# Altium PCB MP1484_with_5V_Output.PcbDoc
Units mm, origin at the board's own origin, x right, y up, seen from the top; angles counter-clockwise.
Board outline 23.7 x 14.4 mm, 2 copper layers (Top Layer, Bottom Layer); 17 components, 11 nets, 48 pads, 10 vias.
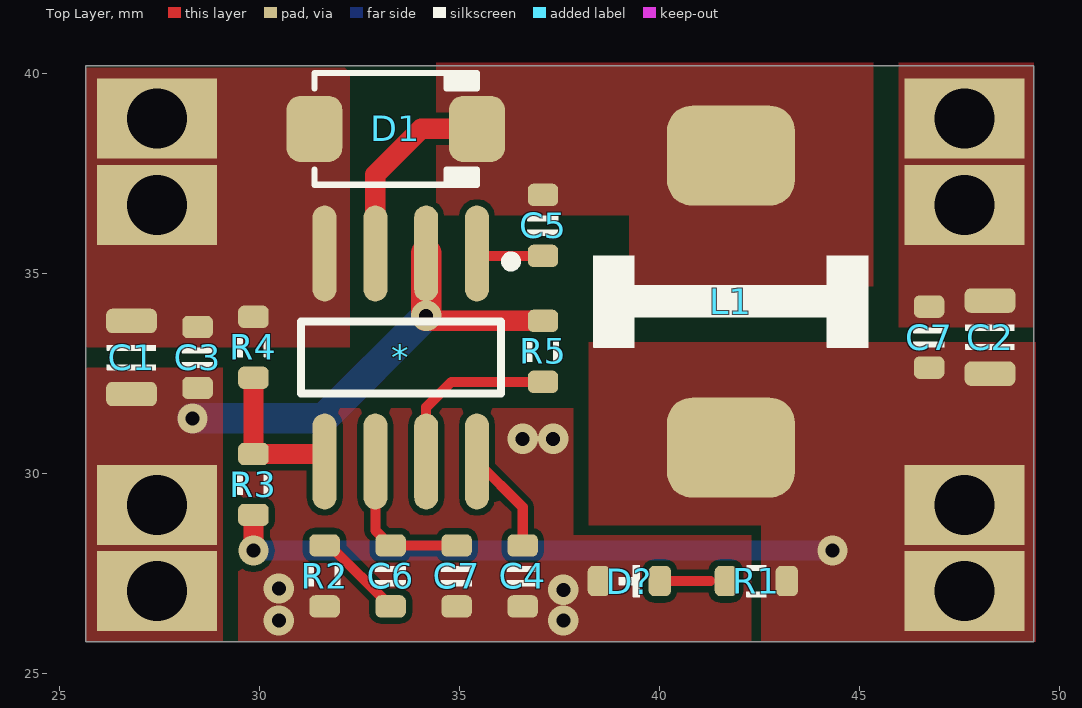
[diagram p0: Top Layer view]
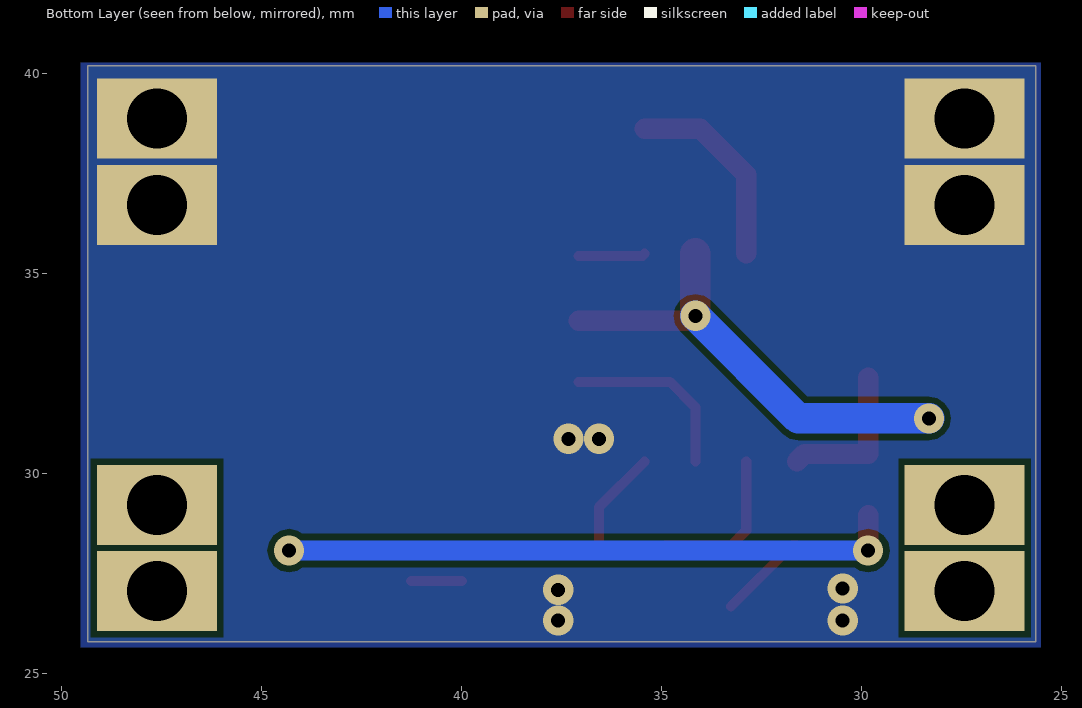
[diagram p1: Bottom Layer view, seen from below]
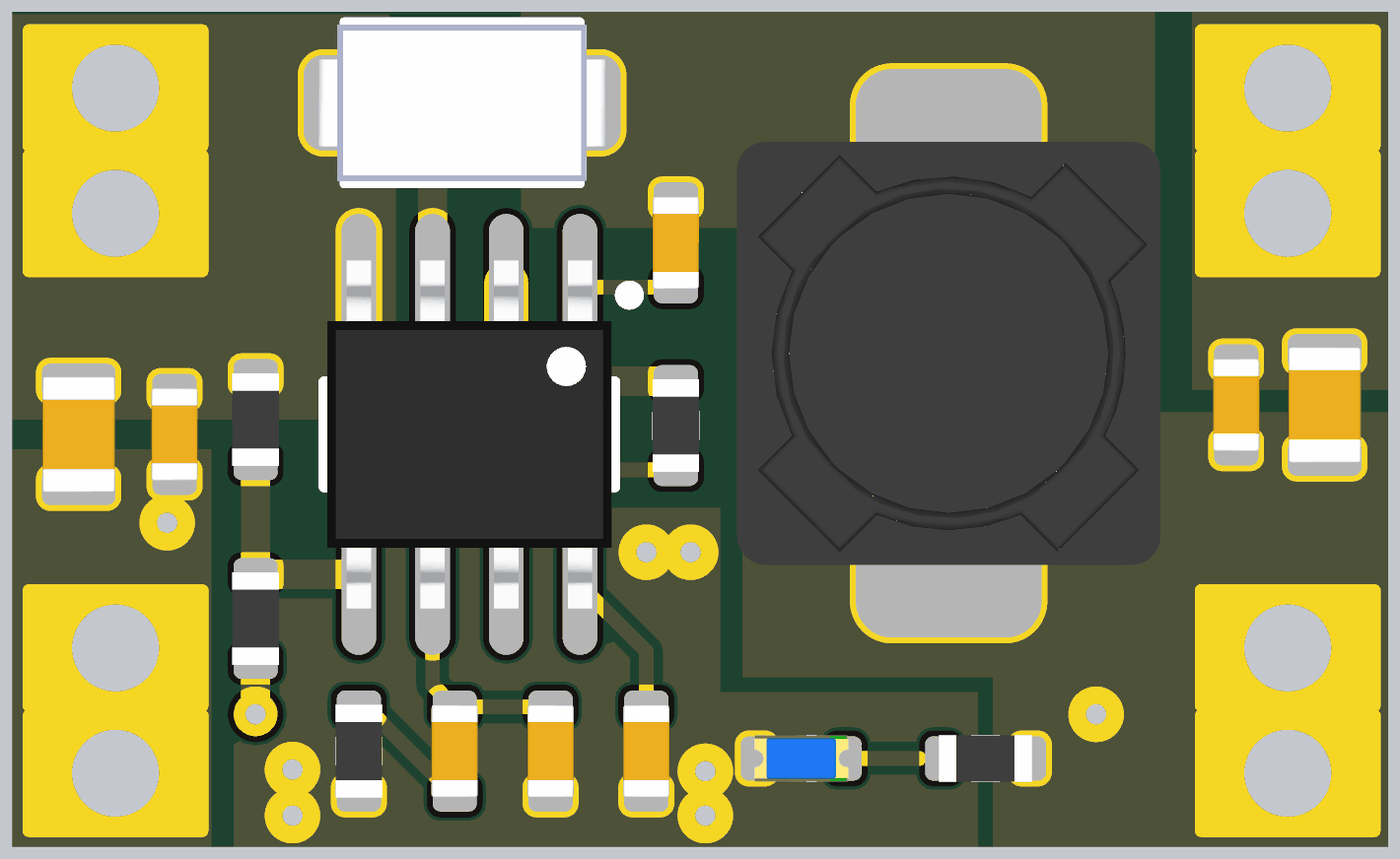
[diagram p2: 3D render of the assembled board from above, using the file's embedded part models]

## Layer stack, top to bottom
Top Solder: solder mask 0.0102, Solder Resist, Dk 3.5
Top Layer: signal copper 0.0356
Dielectric 1: dielectric 0.32, FR-4, Dk 4.8
Bottom Layer: signal copper 0.0356
Bottom Solder: solder mask 0.0102, Solder Resist, Dk 3.5

## Board outline
25.654,25.781 49.354,25.781 49.354,40.181 25.654,40.181

## Design rules (kind name [scope] priority, off if disabled: settings)
Clearance [All] p1: gap=0.152 ignorepadtopadclearanceinfootprint=TRUE
PolygonConnect PolygonConnect_1 [All] p1: connectstyle=Direct reliefconductorwidth=0.254 reliefentries=4 polygonreliefangle="90 Angle" airgapwidth=0.254
PolygonConnect [All] p2: connectstyle=Relief reliefconductorwidth=0.254 reliefentries=4 polygonreliefangle="90 Angle" airgapwidth=0.254
RoutingVias [All] p1: holewidth=0.35 width=0.756 viastyle="Through Hole" minholewidth=0.35 minwidth=0.756 maxholewidth=2.54 maxwidth=2.54
SolderMaskExpansion [All] p1: expansion=0.102
Width [All] p1: maxlimit=254 minlimit=0.152 preferedwidth=0.254 minimp=50.000000 maximp=50.000000 favimp=50.000000
30 further rules are at their usual default settings.

## Classes and differential pairs
component class MP1484_with_5V_Output: * C1 C2 C3 C4 C5 C6 C7 D1 D? L1 R1 R2 R3 R4 R5

## Components (designator, comment, footprint, x,y, rotation, side; value= is the part's Value field where it differs from the comment)
* "MP1484" SOIC8N 33.528,32.893 r270 top
C1 "Cap" CAP_0805 26.797,32.893 r270 top value=1uF
C2 "Cap" CAP_0805 48.26,33.401 r270 top value=22uF
C3 "Cap" CAP_0603 28.448,32.893 r270 top value=220nF
C4 "Cap" CAP_0603 36.576,27.432 r90 top value=0.1uF
C5 "Cap" CAP_0603 37.084,36.195 r270 top value=10nF
C6 "Cap" CAP_0603 33.274,27.432 r270 top value=6.8nF
C7 "Cap" CAP_0603 46.736,33.401 r90 top value=220nF
C7 "Cap" CAP_0603 34.925,27.432 r270 top value=220nF
D1 "SS24" DO-214AC 33.401,38.608 r0 top
D? "G" LED_0603 39.243,27.305 r180 top
L1 "Ind" IND_CDRH74 41.783,34.29 r270 top value=?H
R1 "Res" RES_0603 42.418,27.305 r180 top value=1K
R2 "Res" RES_0603 31.623,27.432 r270 top value=6.8K
R3 "Res" RES_0603 29.845,29.718 r90 top value=68K
R4 "Res" RES_0603 29.845,33.147 r90 top value=14.7K
R5 "Res" RES_0603 37.084,33.045 r270 top value=100K

## Footprints (in the part's own frame and the unit in brackets; to place one, negate y for a bottom-side part, rotate by r counter-clockwise, add the part's x,y. Pads: shape width x height; smd on the part's side, far side on the other; paste and mask are expansions set on the pad)
CAP_0603 [mil]
  rrect50% 22x30 smd: 1(-30,0) 2(30,0)
  silkscreen extent -10,-15 10,15, body extent -31,-16 31,16, height 31
CAP_0805 [mil]
  rrect50% 24x50 smd: 1(-36,0) 2(36,0)
  silkscreen extent -12,-24 12,24, body extent -39,-25 39,25, height 39
DO-214AC [mil] "SMA"
  rrect50% 55x65 smd: 1(-80,0) 2(80,0)
  silkscreen extent -80,-55 80,55, body extent -98,-53 98,53, height 85
IND_CDRH74 [mm]
  rrect50% 2.5x3.2 smd: 1(-3.65,0) 2(3.65,0)
  silkscreen extent -1.14,-3.43 1.14,3.43, body extent -3.65,-3.65 3.65,3.65, height 4.5
LED_0603 [mil]
  rrect50% 22x30 smd: 1(-30,0) 2(30,0)
  silkscreen extent -10,-16 10,16, body extent -32,-16 32,16, height 24
RES_0603 [mil]
  rrect50% 22x30 smd: 1(-30,0) 2(30,0)
  silkscreen extent -10,-16 10,16, body extent -31,-16 31,16, height 18
SOIC8N [mm] "SOIC, 8-Leads, Body 4.9x3.9mm, Pitch 1.27mm, IPC Medium Density"
  oval 2.4x0.6 smd: 1(-2.6,1.905) 2(-2.6,0.635) 3(-2.6,-0.635) 4(-2.6,-1.905) 5(2.6,-1.905) 6(2.6,-0.635) 7(2.6,0.635) 8(2.6,1.905)
  silkscreen extent -2.52,-2.5 0.9,2.88, body extent -3,-2.45 3,2.45, height 1.75

## Part data
*: "? 3A Continuous Output Current / ? Wide 4.75V to 18V Operating Input Range / ? Integrated 85m? Power MOSFET Switches / ? Output Adjustable from 0.925V to 20V / ? Up to 95% Efficiency / ? Programmable Soft-Start / ? Stable with Low ESR Ceramic Output Capacitors / ? Fixed 340KHz Frequency / ? Cycle-by-Cycle Over Current Protection / ? Input Under Voltage Lockout / ? Thermally Enhanced 8-Pin SOIC Package"
D1: library part SchottkyDiode, "Schottky Diode"
D?: library part LED, "LED"
L1: "Inductor", Specification="±5% 100mA"

## Free pads (board coordinates)
  rrect0% 3x2 hole 1.5: 1(47.625,27.051)
  rect 3x2 hole 1.5: 2(47.625,29.21) 3(47.625,38.862) 4(47.625,36.703) 5(27.432,38.862) 6(27.432,36.703) 7(27.432,29.21) 8(27.432,27.051)

## Via types
v1: diameter 0.756, hole 0.35, Top Layer to Bottom Layer, 10 vias

## Nets (pads, with @x,y where several pads share a name; then routed paths per layer and width w, separated by ;. In a path a pad name is that pad's centre, name@x,y a point inside that pad or via, vN(x,y) a via of type N, cw(c..) or ccw(c..) an arc to the next point about the centre after c; other vN are vias at no path point)
5V: C2.2 C7.1@46.736,32.639 L1.2 pad.1 pad.2 R1.1 R3.1 | length 15.4
  Top Layer w0.508: v1(29.845,28.067) R3.1
  Bottom Layer w0.508: v1(29.845,28.067) v1(44.323,28.067)
GND: *.4 C1.1 C2.1 C3.1 C4.1 C7.2 D1.1 D?.2 pad.3 pad.4 pad.5 pad.6 R2.2 R4.2
  other v1: 30.48,26.32 37.592,26.32 37.592,27.085 30.48,27.114 36.576,30.861 37.338,30.861
Net*_1: *.1 C5.2 | length 1.7
  Top Layer w0.254: *.1 35.493,35.433 C5.2
Net*_3: *.3 C5.1 D1.2 L1.1 | length 5
  Top Layer w0.508: *.3 32.893,37.465 34.036,38.608 D1.2
Net*_5: *.5 R3.2 R4.1 | length 3.8
  Top Layer w0.508: R4.1 R3.2 31.436,30.48 *.5
Net*_6: *.6 C6.1 C7.1@34.925,28.194 | length 3.9
  Top Layer w0.254: *.6 32.893,28.575 C6.1 C7.1@34.925,28.194
Net*_7: *.7 R5.2 | length 4.5
  Top Layer w0.254: *.7 34.163,31.648 34.798,32.283 R5.2
Net*_8: *.8 C4.2 | length 2.6
  Top Layer w0.254: *.8 36.576,29.15 C4.2
NetC6_2: C6.2 R2.1 | length 2.3
  Top Layer w0.254: R2.1 31.75,28.194 C6.2
NetD?_1: D?.1 R1.2 | length 1.3
  Top Layer w0.254: D?.1 41.275,27.305
Vin: *.2 C1.2 C3.2 pad.7 pad.8 R5.1 | length 11.4
  Top Layer w0.508: v1(34.163,33.934) 34.29,33.807 R5.1
  Top Layer w0.762: v1(34.163,33.934) *.2
  Bottom Layer w0.762: v1(28.321,31.369) 31.598,31.369 v1(34.163,33.934)

## Polygon pours and split planes (outlines as drawn)
GND on Top Layer "GND" (solid, pour order 26): 42.291,25.781 42.291,28.448 37.846,28.448 37.846,31.623 29.489,31.623 29.464,31.648 29.464,25.781
Net*_3 on Top Layer "GND" (solid, pour order 24): 45.339,40.259 45.339,34.671 39.243,34.671 39.243,36.449 34.417,36.449 34.417,40.259
GND on Top Layer "GND" (solid, pour order 22): 52.832,36.957
GND on Top Layer "Top Layer-GND 1" (solid, pour order 20): 49.354,40.259 49.354,33.655 45.974,33.655 45.974,40.259
5V on Top Layer "Top Layer-5V" (solid, pour order 12): 49.403,25.781 42.545,25.781 42.545,28.702 38.227,28.702 38.227,33.274 49.403,33.274
GND on Top Layer "Top Layer-GND" (solid, pour order 4): 25.654,40.132 32.131,40.132 32.258,40.005 32.258,33.147 25.654,33.147
Vin on Top Layer "Top Layer-Vin" (solid, pour order 2): 25.654,40.132
Vin on Top Layer "Top Layer-Vin 1" (solid, remove dead copper, pour order 0): 25.654,25.781 29.083,25.781 29.083,32.639 25.654,32.639
GND on Bottom Layer "Bottom Layer-GND 1" (solid, pour order 16): 25.527,40.259 25.527,25.654 49.53,25.654 49.53,40.259
GND on Bottom Layer "Bottom Layer-GND" (solid, pour order 18): 54.991,32.512

## Silkscreen, mask and mechanical layers (free items; w line width, h text height)
Mechanical 1:
  the board outline again, w0.254